# Altium PCB TAUV-Powerboard-2023.PcbDoc
Units mil, origin at the board's own origin, x right, y up, seen from the top; angles counter-clockwise.
Board outline 4762.5 x 3417.5 mil, 4 copper layers (Component Side, Ground Plane, Power Plane, Solder Side), stack 33.234 mil thick; 4 components, 82 nets, 4 pads, 0 vias.
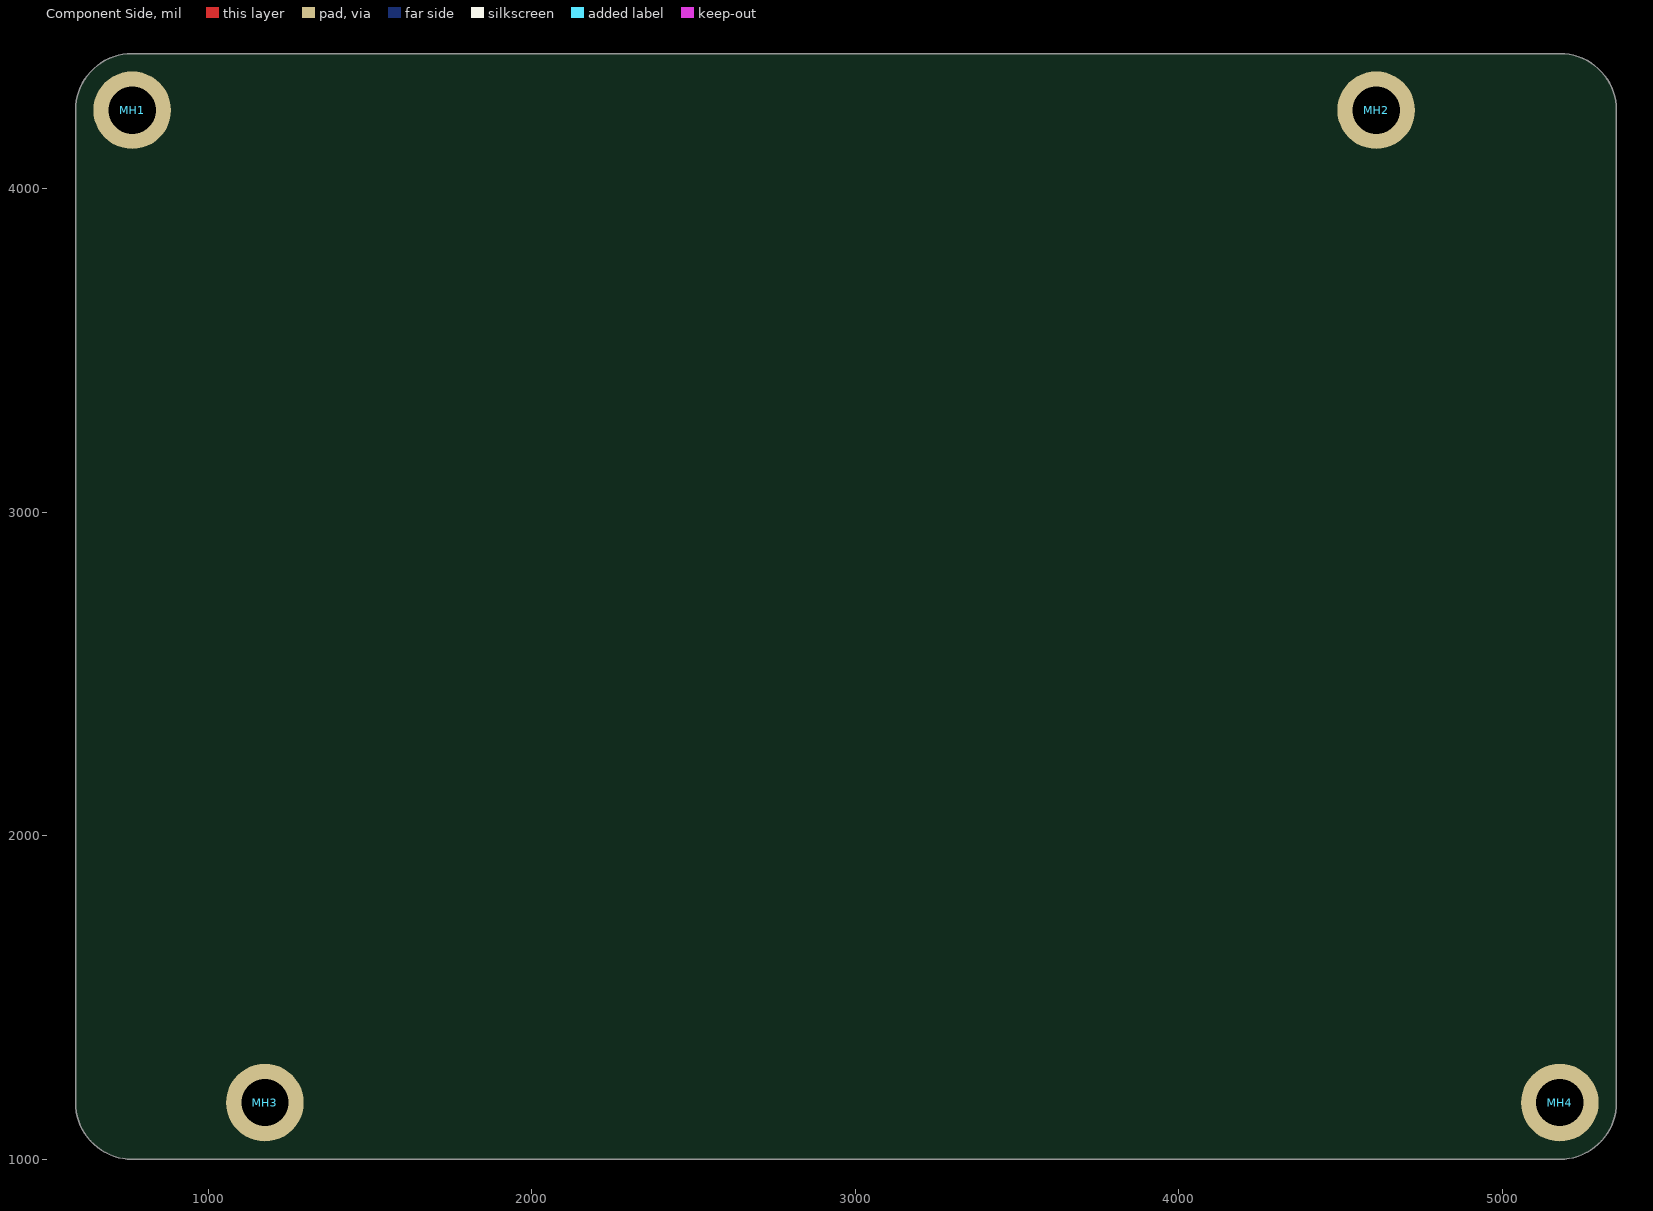
[diagram p0: Component Side view]
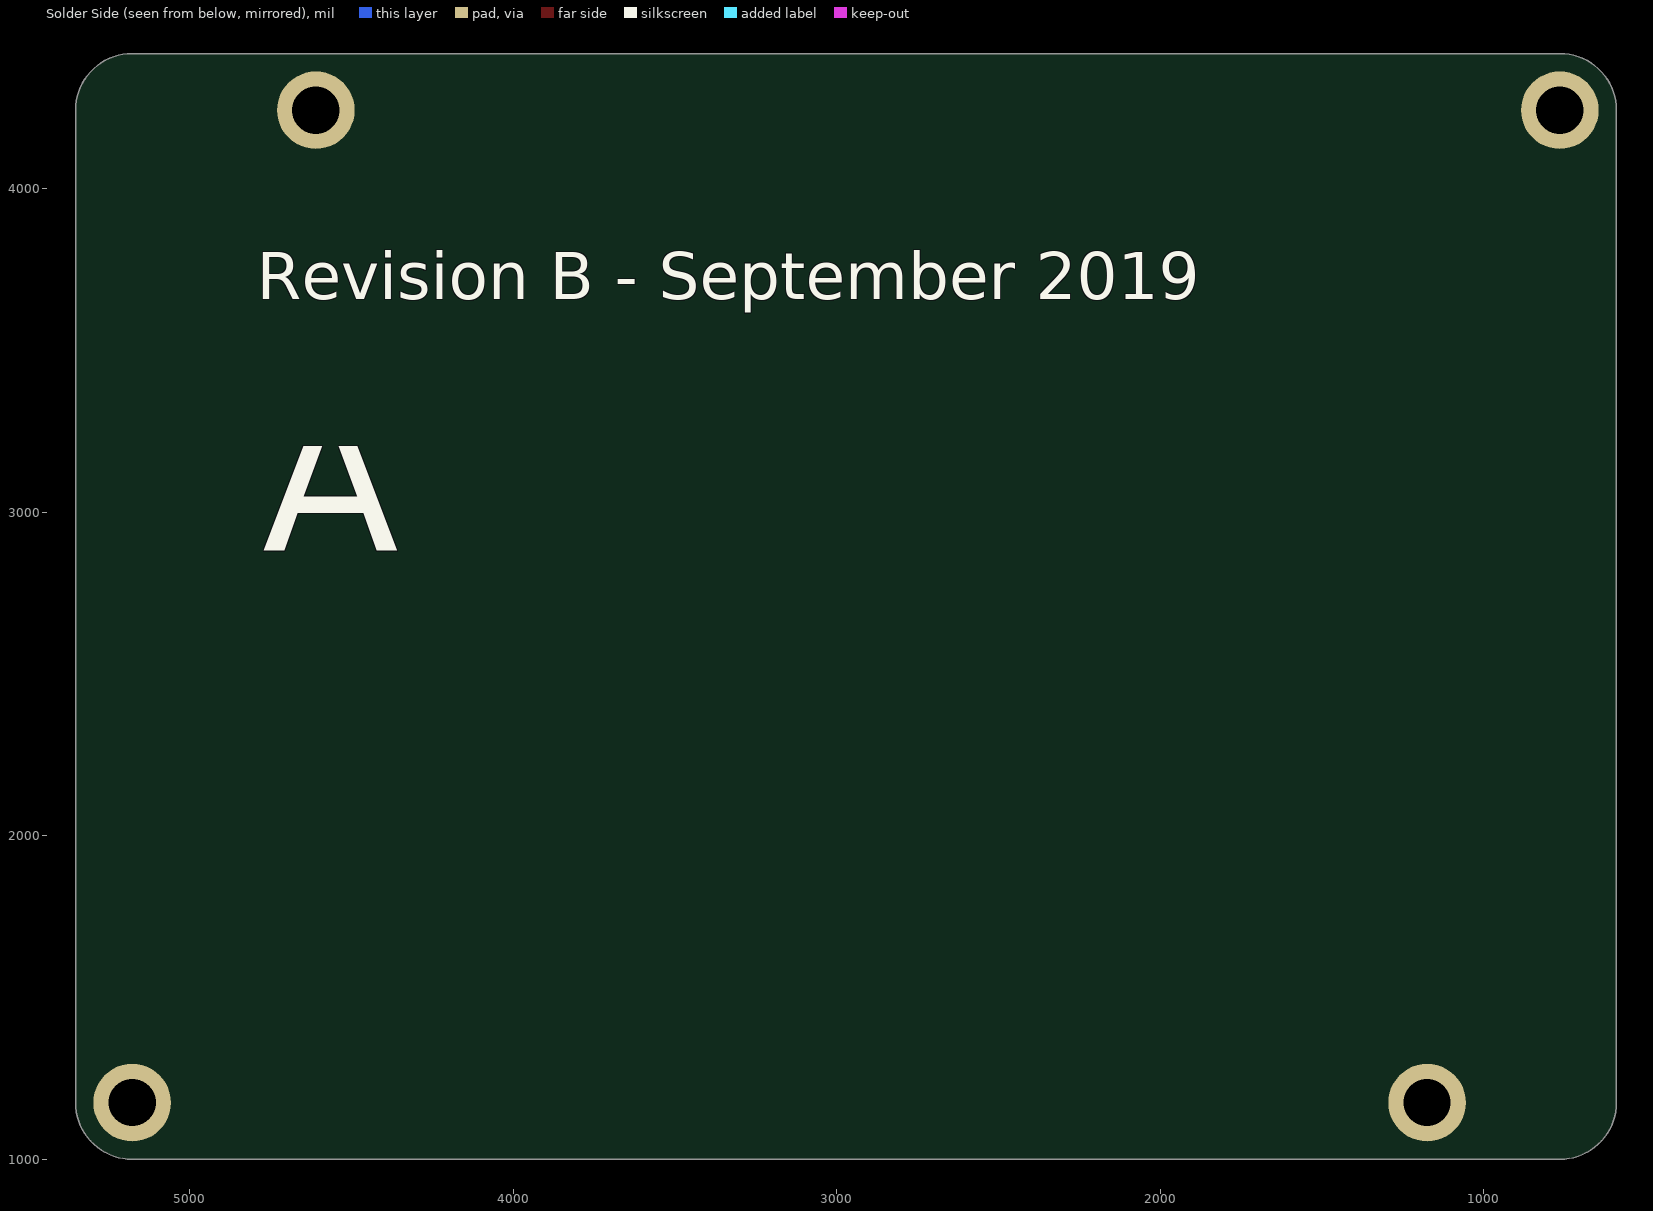
[diagram p1: Solder Side view, seen from below]
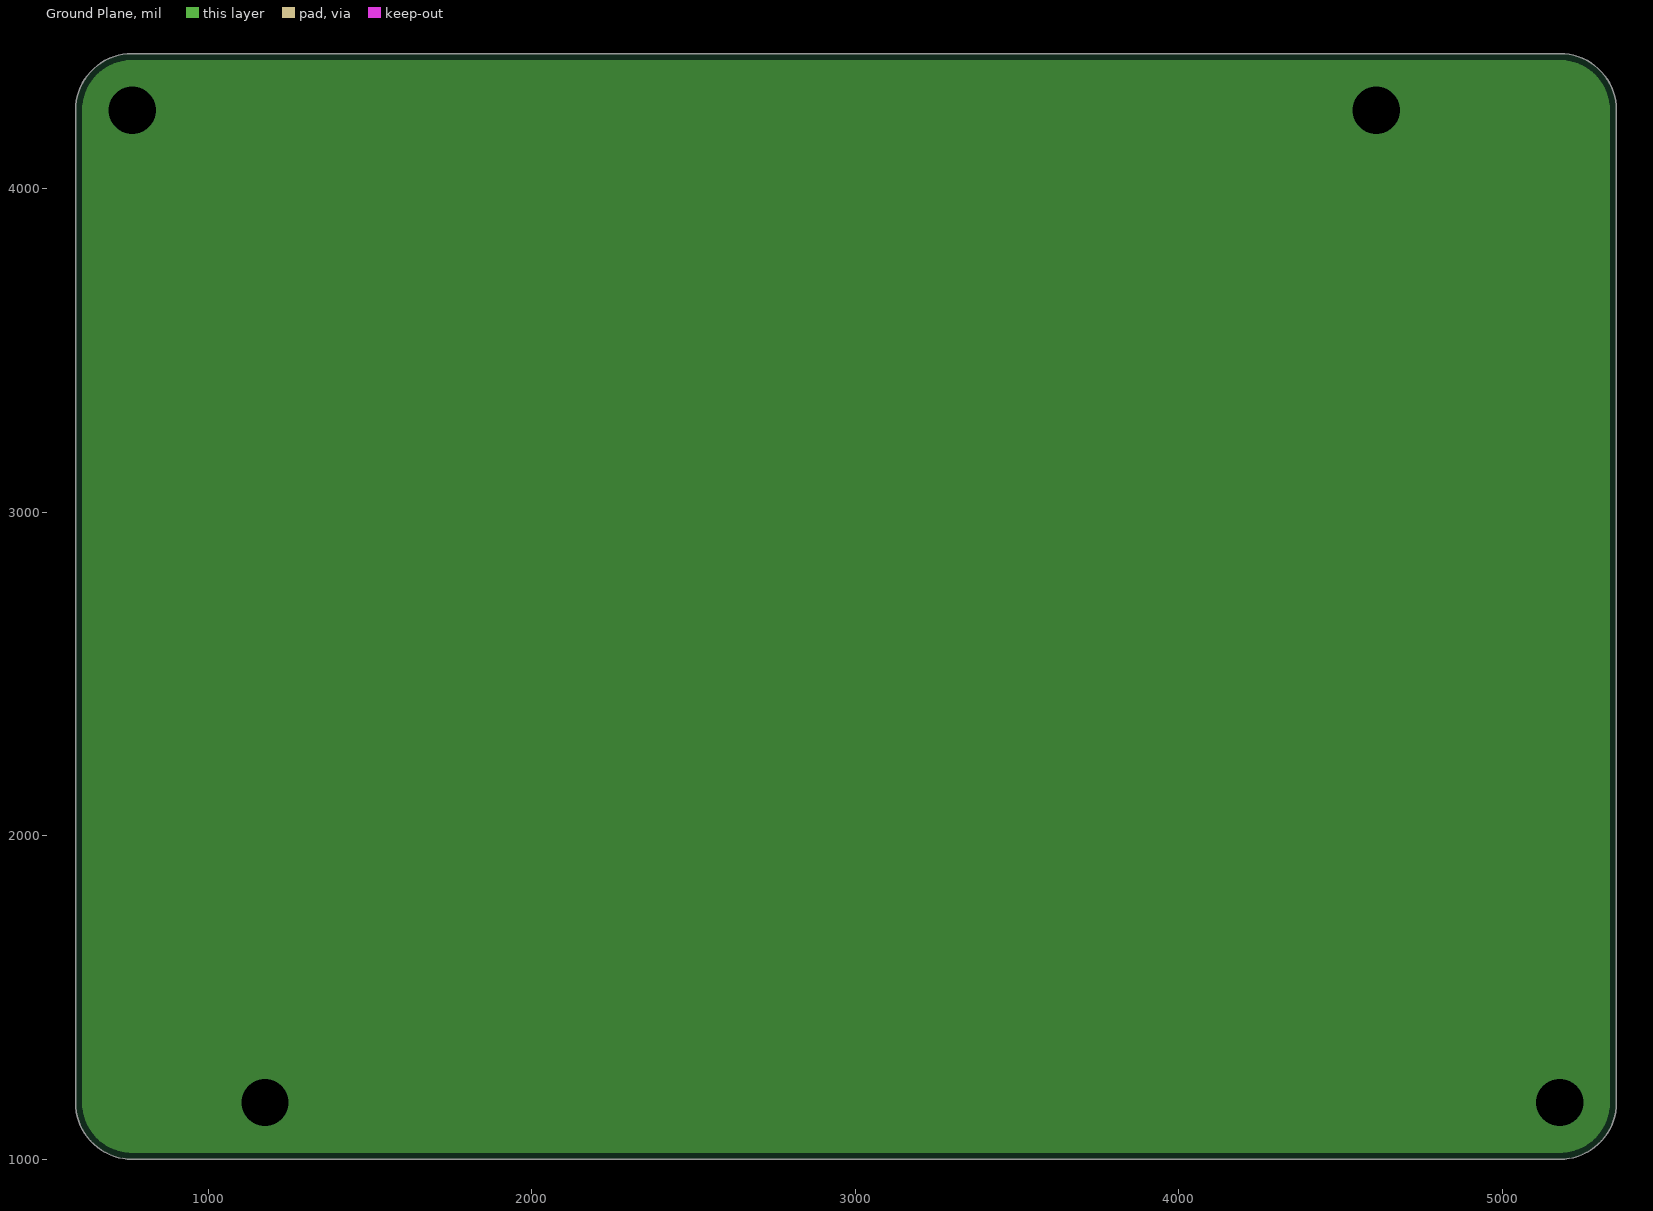
[diagram p2: Ground Plane, clearances drawn from the general rule]
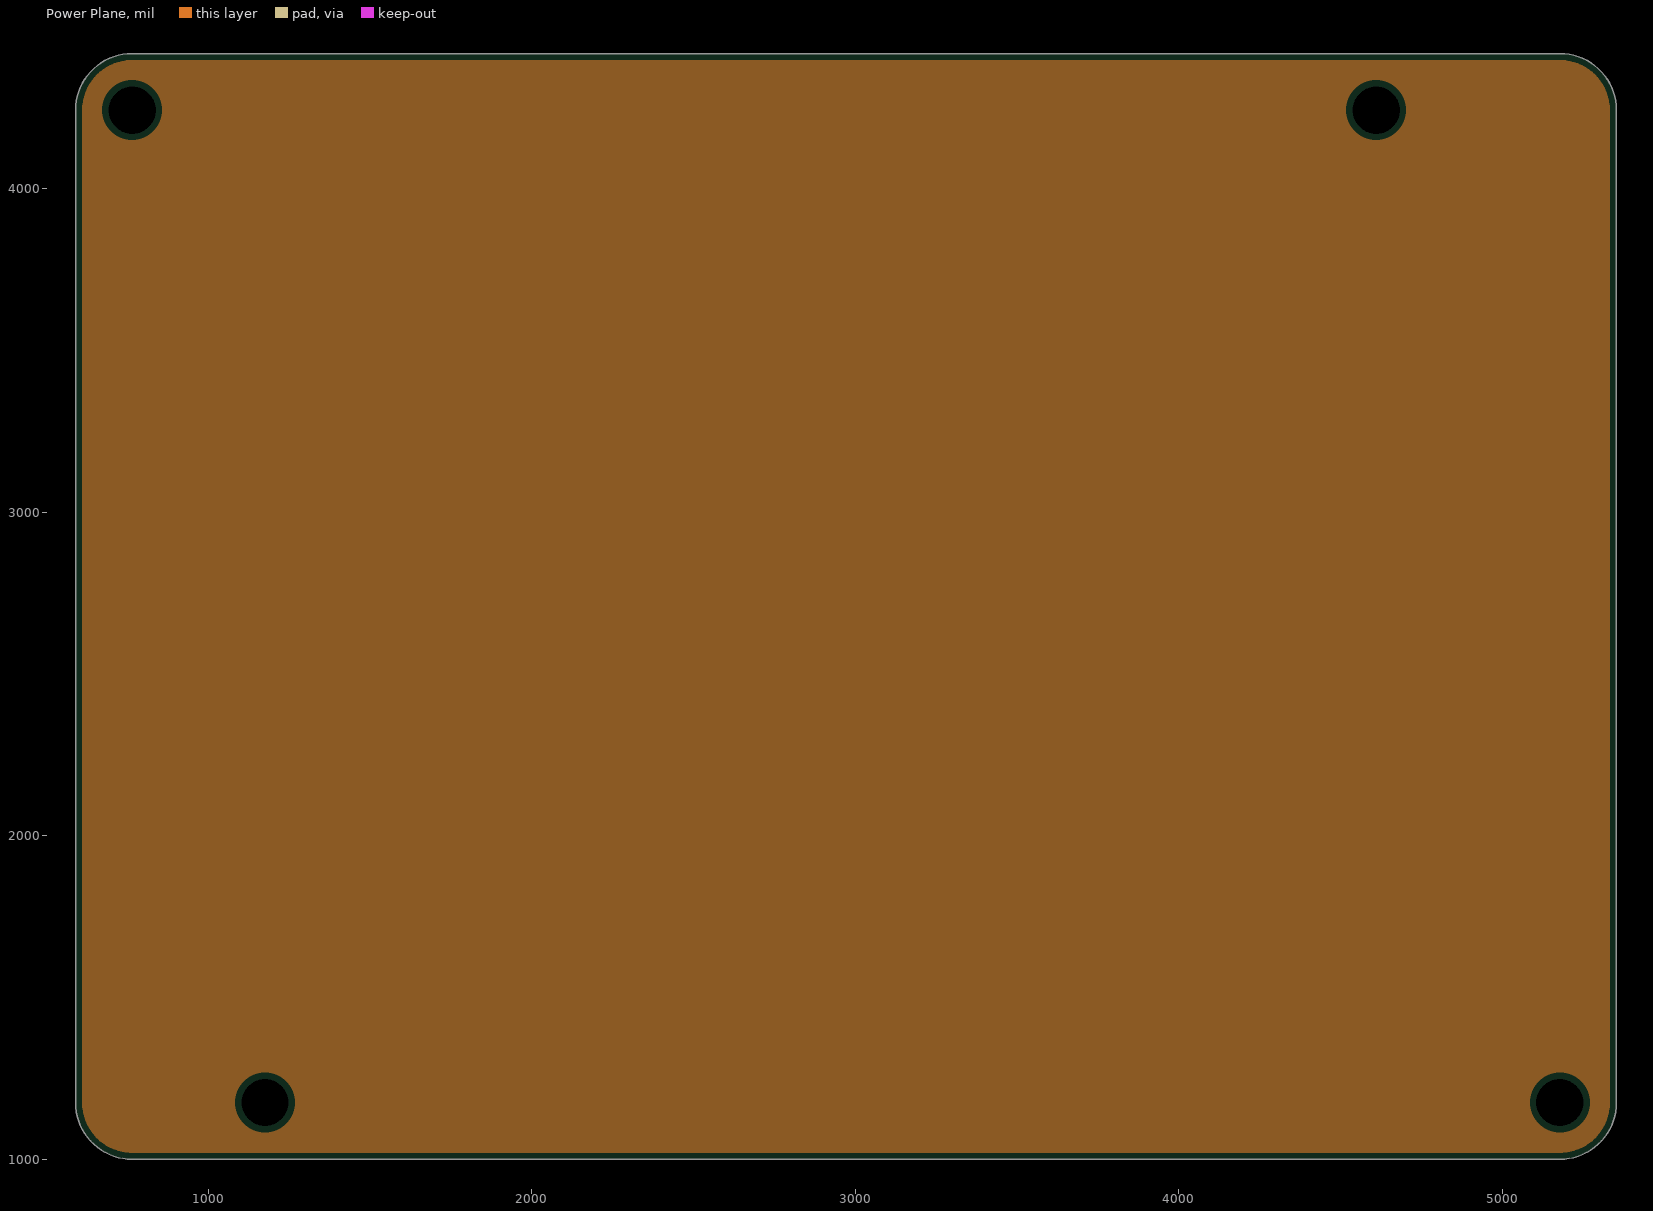
[diagram p3: Power Plane, clearances drawn from the general rule]

## Layer stack, top to bottom
Top Solder: solder mask 0.4, Solder Resist, Dk 3.5
Component Side: signal copper 1.4
Dielectric 1: core 12.6, FR-4, Dk 4.8
Ground Plane: plane copper 1.417, net GND
Dielectric 3: prepreg 5, Dk 4.2
Power Plane: plane copper 1.417, net VCC_3V3
Dielectric 4: core 10, Dk 4.2
Solder Side: signal copper 1.4
Bottom Solder: solder mask 0.4, Solder Resist, Dk 3.5

## Board outline
765,1000 5177.5,1000 ccw(c5177.5,1175) 5352.5,1175 5352.5,4242.5 ccw(c5177.5,4242.5) 5177.5,4417.5 765,4417.5 ccw(c765,4242.5) 590,4242.5 590,1175 ccw(c765,1175)

## Design rules (kind name [scope] priority, off if disabled: settings)
Clearance [All] p1: gap=8 ignorepadtopadclearanceinfootprint=FALSE except(6: Arc-Arc Arc-Track Arc-SMDPad Track-Track Track-SMDPad SMDPad-SMDPad)
Height [All] p1: minheight=0 maxheight=10000 prefheight=500
HoleSize [All] p1: absolutevalues=TRUE maxlimit=400 minlimit=10 maxpercent=80.000 minpercent=20.000
PlaneClearance [All] p1: clearance=20
PlaneConnect [All] p1: planeconnectstyle=Relief reliefexpansion=10 reliefentries=4 reliefconductorwidth=30 reliefairgap=6
PolygonConnect PolygonConnect_1 [InNet('GND')] p1: connectstyle=Direct reliefconductorwidth=50 reliefentries=4 polygonreliefangle="90 Angle" airgapwidth=10
PolygonConnect [All] p2: connectstyle=Relief reliefconductorwidth=10 reliefentries=4 polygonreliefangle="90 Angle" airgapwidth=10
RoutingVias [All] p1: holewidth=15 width=30 viastyle="Through Hole" minholewidth=15 minwidth=30 maxholewidth=28 maxwidth=50
SolderMaskExpansion [All] p1: expansion=4 istentingtop=FALSE
Width [All] p1: maxlimit=100 minlimit=8 preferedwidth=10
26 further rules are at their usual default settings.

## Components (designator, comment, footprint, x,y, rotation, side; value= is the part's Value field where it differs from the comment)
MH1 "#4-40" "Mounting Hole #4-40"#1 590,4417.5 r0 top locked
MH2 "#4-40" "Mounting Hole #4-40"#2 4610,4242.5 r0 top locked
MH3 "#4-40" "Mounting Hole #4-40"#2 1175,1175 r0 top locked
MH4 "#4-40" "Mounting Hole #4-40"#3 5187.5,1165 r0 top locked

## Footprints (in the part's own frame and the unit in brackets; to place one, negate y for a bottom-side part, rotate by r counter-clockwise, add the part's x,y. Pads: shape width x height; smd on the part's side, far side on the other; paste and mask are expansions set on the pad)
"Mounting Hole #4-40"#1 [mm] "Mounting Hole for ANSI #4-40 w/ Flat Washer, Loose Fit"
  round 6.1 hole 3.7: 0(4.445,-4.445)
"Mounting Hole #4-40"#2 [mm] "Mounting Hole for ANSI #4-40 w/ Flat Washer, Loose Fit"
  round 6.1 hole 3.7: 0(0,0)
"Mounting Hole #4-40"#3 [mm] "Mounting Hole for ANSI #4-40 w/ Flat Washer, Loose Fit"
  round 6.1 hole 3.7: 0(-0.254,0.254)

## Part data
MH1 MH2 MH3 MH4: library part "Mounting Hole #4-40, Loose Fit", "Mounting Hole for ANSI #4-40 w/ Flat Washer, Loose Fit", Datasheet=http://blogs.mentor.com/tom-hausherr/blog/tag/pcb-mounting-holes/

## Nets (pads, with @x,y where several pads share a name; then routed paths per layer and width w, separated by ;. In a path a pad name is that pad's centre, name@x,y a point inside that pad or via, vN(x,y) a via of type N, cw(c..) or ccw(c..) an arc to the next point about the centre after c; other vN are vias at no path point)
EXT_GATE: 
GATE_EN: 
GND: MH1.0 MH2.0 MH3.0 MH4.0
NetC1_2: 
NetC2_1: 
NetC2_2: 
NetC3_1: 
NetC3_2: 
NetC4_2: 
NetC5_1: 
NetC5_2: 
NetC6_1: 
NetC6_2: 
NetC15_2: 
NetC16_1: 
NetC16_2: 
NetC17_2: 
NetC18_1: 
NetC18_2: 
NetC19_1: 
NetC20_1: 
NetC20_2: 
NetC21_1: 
NetC21_2: 
NetC40_1: 
NetD1_2: 
NetD2_2: 
NetD4_1: 
NetD4_2: 
NetD5_1: 
NetD5_2: 
NetD6_1: 
NetD6_2: 
NetD7_1: 
NetD8_1: 
NetD9_1: 
NetD10_1: 
NetD11_2: 
NetD12_1: 
NetD13_1: 
NetD14_1: 
NetD17_1: 
NetD18_2: 
NetD19_2: 
NetD20_2: 
NetD21_2: 
NetD22_2: 
NetP3_5: 
NetP3_6: 
NetP3_11: 
NetP3_13: 
NetR19_1: 
NetR21_1: 
NetR23_1: 
NetR25_1: 
NetR26_2: 
NetR29_1: 
NetR33_1: 
NetR34_1: 
NetR35_1: 
NetR37_1: 
NetR38_1: 
NetR39_1: 
NetRT1_2: 
OCP_N: 
P1: 
P2: 
REG25: 
RSENSE+: 
RSENSE-: 
SRN: 
SRP: 
THRST_EN: 
THRUSTERS_GATE: 
VBAT: 
VBAT_EXT: 
VBAT_THRUSTERS: 
VCC_3V3: 
VCC_5V: 
VCC_5V_SRV: 
VCC_10V: 
VCC_BATT_FILT: 

## Polygon pours and split planes (outlines as drawn)
VCC_3V3 on Power Plane (split plane): 5188.56,4397.1 5199.56,4395.92 5210.45,4393.96 5221.17,4391.22 5231.67,4387.73 5241.89,4383.49 5251.78,4378.54 5261.3,4372.89 5270.39,4366.58 5279,4359.64 5287.1,4352.1 5294.64,4344 5301.58,4335.39 5307.89,4326.3 5313.54,4316.78 5318.49,4306.89 5322.73,4296.67 5326.22,4286.17 5328.96,4275.45 5330.92,4264.56 5332.1,4253.56 5332.47,4243.21 5332.4,4242.5 5332.4,1175 5332.47,1174.29 5332.1,1163.94 5330.92,1152.94 5328.96,1142.05 5326.22,1131.33 5322.73,1120.83 5318.49,1110.61 5313.54,1100.72 5307.89,1091.2 5301.58,1082.11 5294.64,1073.5 5287.1,1065.4 5279,1057.86 5270.39,1050.92 5261.3,1044.61 5251.78,1038.96 5241.89,1034.01 5231.67,1029.77 5221.17,1026.28 5210.45,1023.54 5199.56,1021.58 5188.56,1020.4 5178.21,1020.03 5177.5,1020.1 765,1020.1 764.29,1020.03 753.94,1020.4 742.94,1021.58 732.05,1023.54 721.33,1026.28 710.83,1029.77 700.61,1034.01 690.72,1038.96 681.2,1044.61 672.11,1050.92 663.5,1057.86 655.4,1065.4 647.86,1073.5 640.92,1082.11 634.61,1091.2 628.96,1100.72 624.01,1110.61 619.77,1120.83 616.28,1131.33 613.54,1142.05 611.58,1152.94 610.4,1163.94 610.03,1174.29 610.1,1175 610.1,4242.5 610.03,4243.21 610.4,4253.56 611.58,4264.56 613.54,4275.45 616.28,4286.17 619.77,4296.67 624.01,4306.89 628.96,4316.78 634.61,4326.3 640.92,4335.39 647.86,4344 655.4,4352.1 663.5,4359.64 672.11,4366.58 681.2,4372.89 690.72,4378.54 700.61,4383.49 710.83,4387.73 721.33,4391.22 732.05,4393.96 742.94,4395.92 753.94,4397.1 764.29,4397.47 765,4397.4 5177.5,4397.4 5178.21,4397.47
GND on Ground Plane (split plane): 5188.56,4397.1 5199.56,4395.92 5210.45,4393.96 5221.17,4391.22 5231.67,4387.73 5241.89,4383.49 5251.78,4378.54 5261.3,4372.89 5270.39,4366.58 5279,4359.64 5287.1,4352.1 5294.64,4344 5301.58,4335.39 5307.89,4326.3 5313.54,4316.78 5318.49,4306.89 5322.73,4296.67 5326.22,4286.17 5328.96,4275.45 5330.92,4264.56 5332.1,4253.56 5332.47,4243.21 5332.4,4242.5 5332.4,1175 5332.47,1174.29 5332.1,1163.94 5330.92,1152.94 5328.96,1142.05 5326.22,1131.33 5322.73,1120.83 5318.49,1110.61 5313.54,1100.72 5307.89,1091.2 5301.58,1082.11 5294.64,1073.5 5287.1,1065.4 5279,1057.86 5270.39,1050.92 5261.3,1044.61 5251.78,1038.96 5241.89,1034.01 5231.67,1029.77 5221.17,1026.28 5210.45,1023.54 5199.56,1021.58 5188.56,1020.4 5178.21,1020.03 5177.5,1020.1 765,1020.1 764.29,1020.03 753.94,1020.4 742.94,1021.58 732.05,1023.54 721.33,1026.28 710.83,1029.77 700.61,1034.01 690.72,1038.96 681.2,1044.61 672.11,1050.92 663.5,1057.86 655.4,1065.4 647.86,1073.5 640.92,1082.11 634.61,1091.2 628.96,1100.72 624.01,1110.61 619.77,1120.83 616.28,1131.33 613.54,1142.05 611.58,1152.94 610.4,1163.94 610.03,1174.29 610.1,1175 610.1,4242.5 610.03,4243.21 610.4,4253.56 611.58,4264.56 613.54,4275.45 616.28,4286.17 619.77,4296.67 624.01,4306.89 628.96,4316.78 634.61,4326.3 640.92,4335.39 647.86,4344 655.4,4352.1 663.5,4359.64 672.11,4366.58 681.2,4372.89 690.72,4378.54 700.61,4383.49 710.83,4387.73 721.33,4391.22 732.05,4393.96 742.94,4395.92 753.94,4397.1 764.29,4397.47 765,4397.4 5177.5,4397.4 5178.21,4397.47

## Silkscreen, mask and mechanical layers (free items; w line width, h text height)
Bottom Overlay:
  text "Revision B - September 2019" at 4792.5,3610 h250
  text "A" at 4775,2577.5 h1600
Mechanical 7:
  lines w10: 590,1175 ccw(c765,1175) 765,1000 5177.5,1000 ccw(c5177.5,1175) 5352.5,1175 ; 590,4242.5 cw(c765,4242.5) 765,4417.5 ; 5177.5,4417.5 cw(c5177.5,4242.5) 5352.5,4242.5